# Altium PCB Driver.PcbDoc
Units mil, origin at the board's own origin, x right, y up, seen from the top; angles counter-clockwise.
Board outline 2360 x 2470 mil, 2 copper layers (Top Layer, Bottom Layer); 33 components, 20 nets, 116 pads, 97 vias.
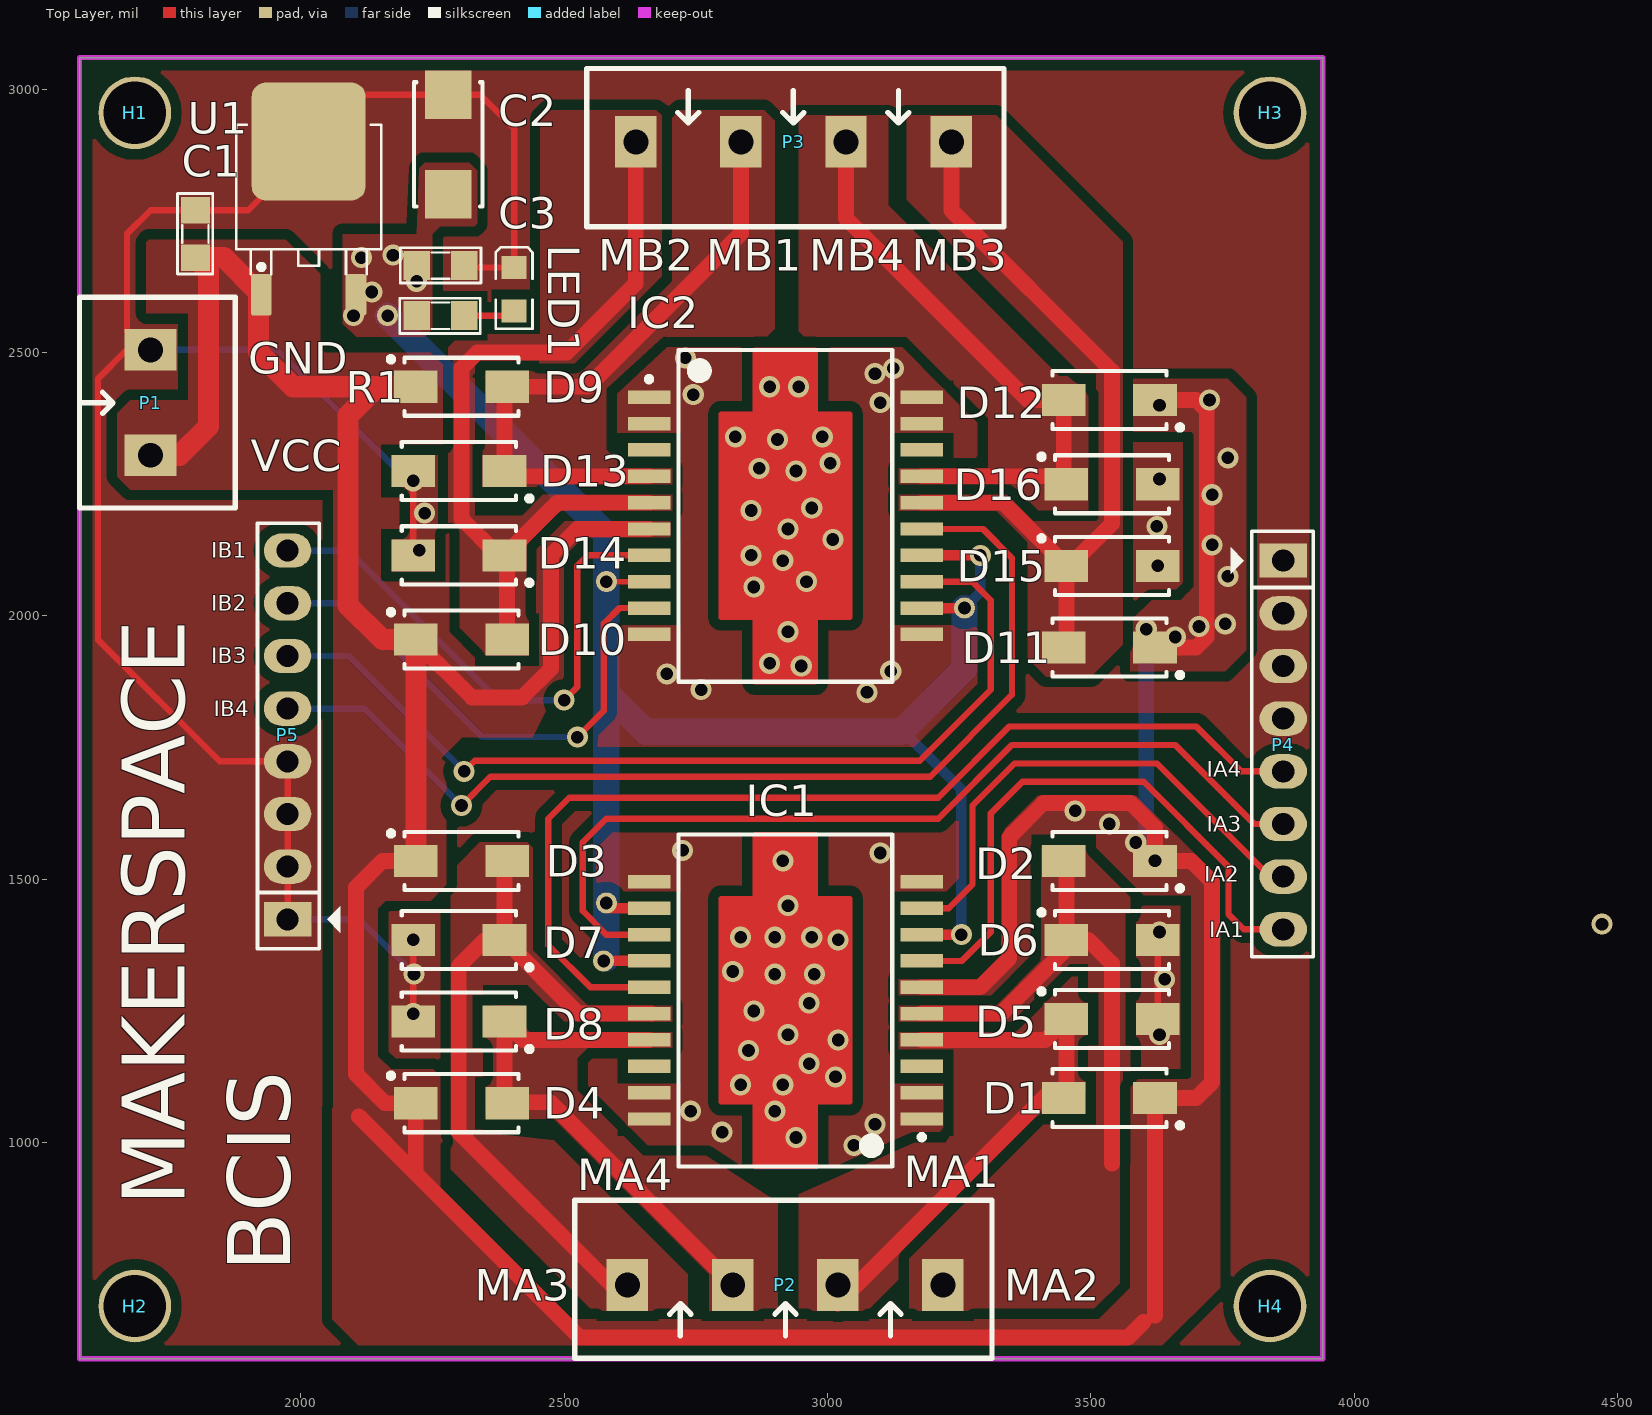
[diagram p0: Top Layer view]
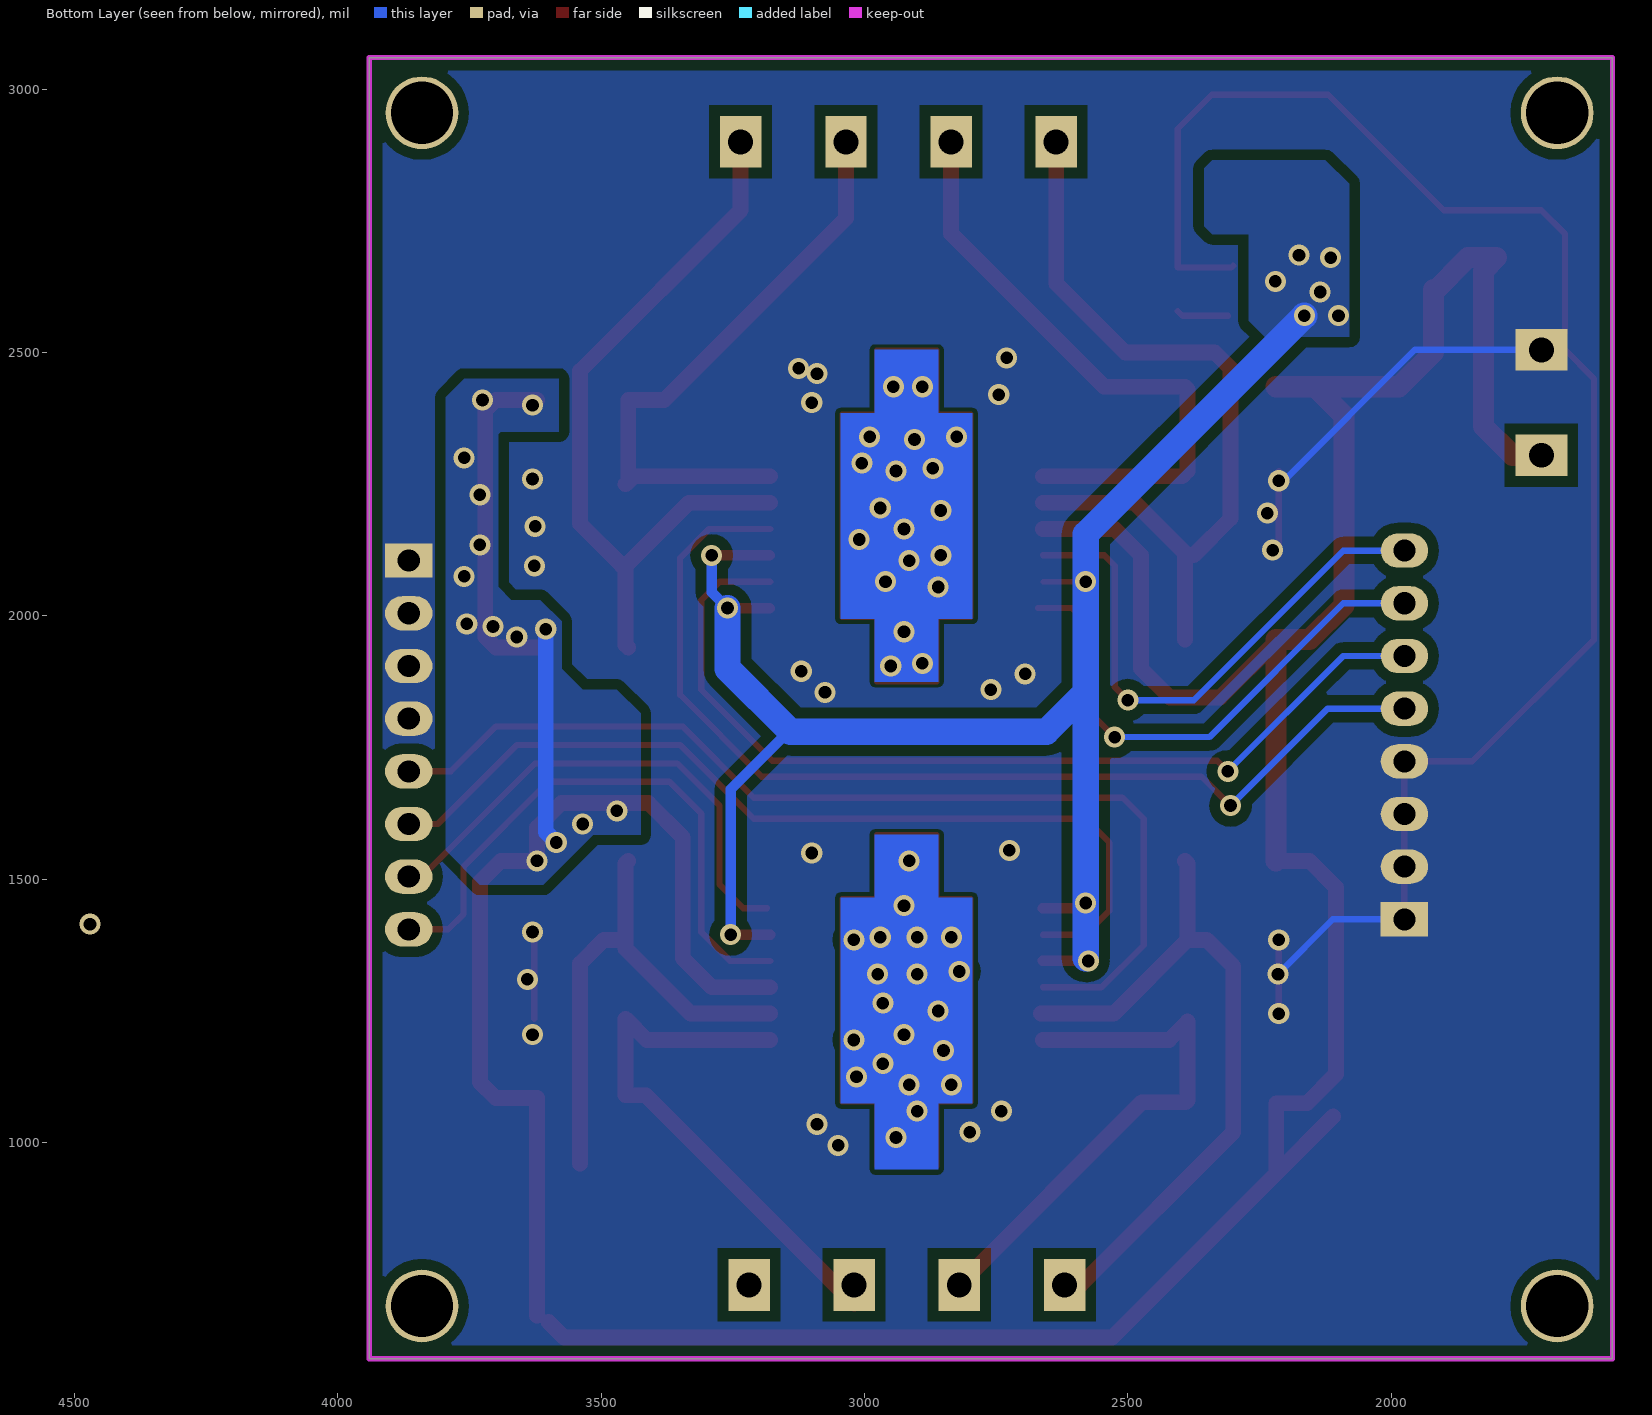
[diagram p1: Bottom Layer view, seen from below]
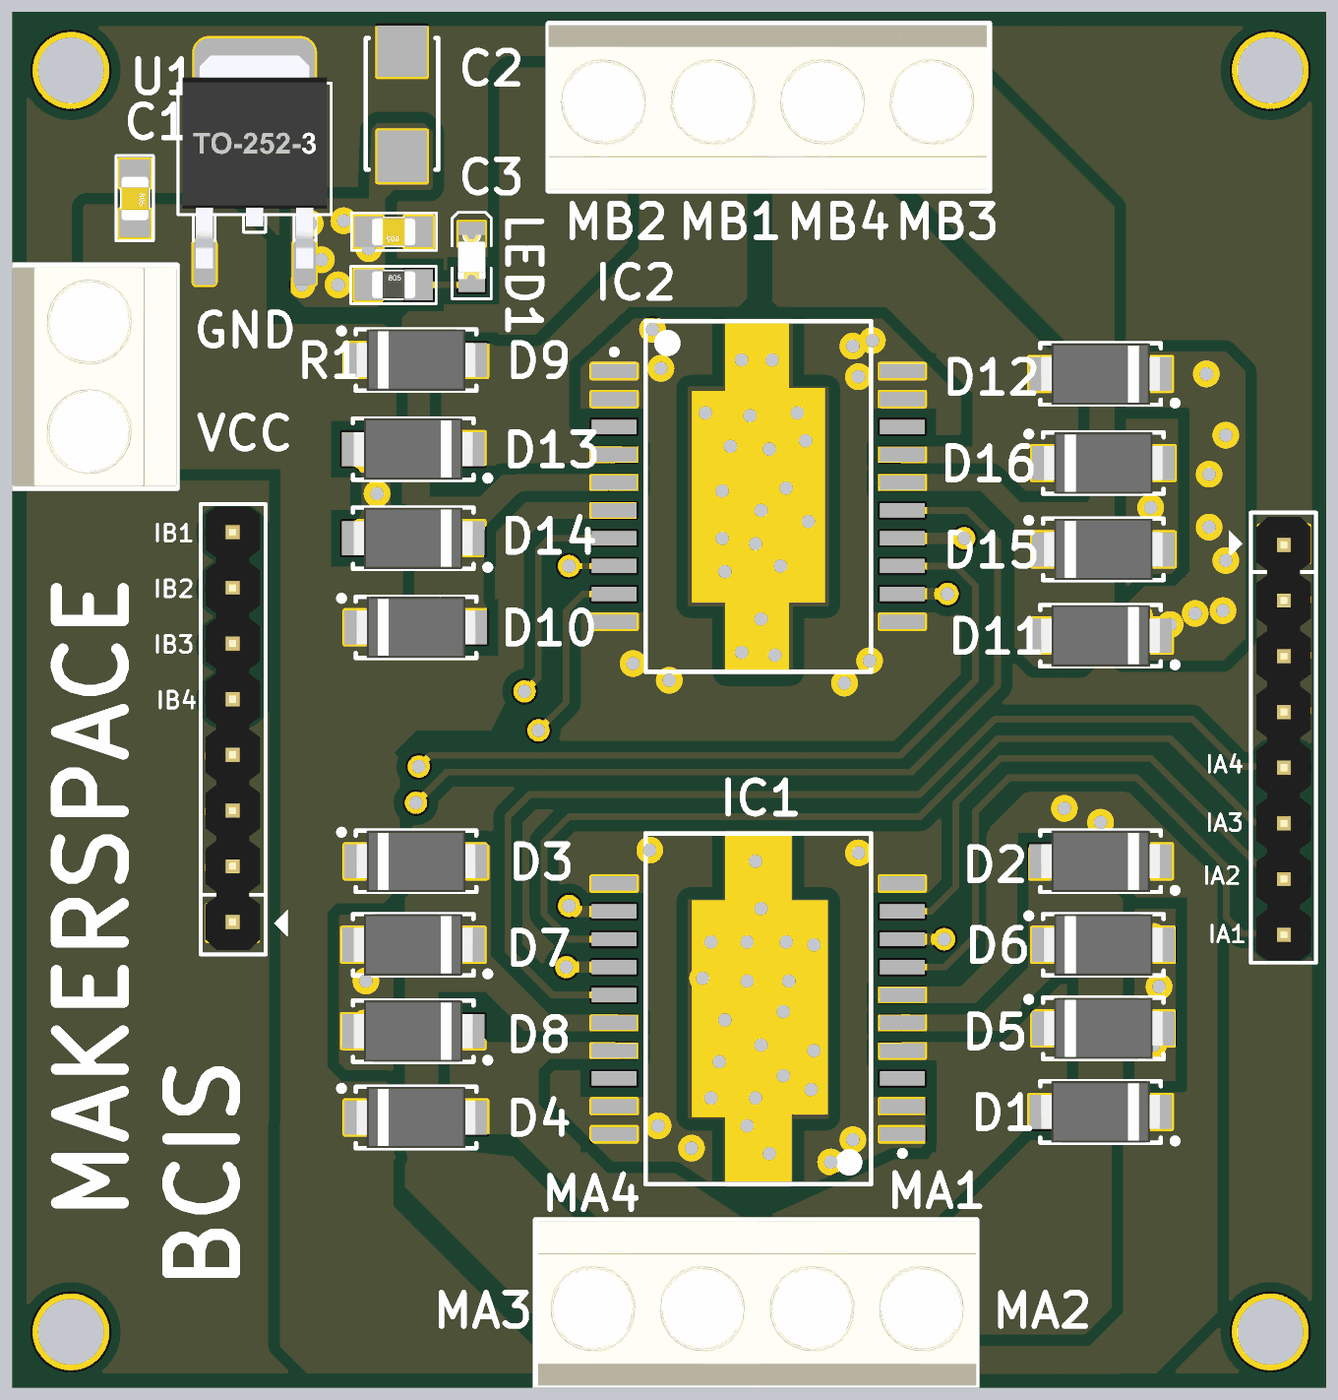
[diagram p2: 3D render of the assembled board from above, using the file's embedded part models]

## Layer stack, top to bottom
Top Solder: solder mask 0.4, Solder Resist, Dk 3.5
Top Layer: signal copper 1.4
Dielectric 1: dielectric 12.6, FR-4, Dk 4.8
Bottom Layer: signal copper 1.4
Bottom Solder: solder mask 0.4, Solder Resist, Dk 3.5

## Board outline
1580,590 3940,590 3940,3060 1580,3060

## Design rules (kind name [scope] priority, off if disabled: settings)
Clearance [All] p1: gap=10 ignorepadtopadclearanceinfootprint=FALSE except(0: Arc-Hole Track-Hole SMDPad-Hole THPad-Hole Via-Hole Fill-Hole Poly-Hole Region-Hole Text-Hole; 20: Arc-Poly Track-Poly SMDPad-Poly THPad-Poly Via-Poly Fill-Poly Poly-Poly)
PlaneConnect [All] p1: planeconnectstyle=Direct reliefexpansion=20 reliefentries=4 reliefconductorwidth=10 reliefairgap=10
PolygonConnect [All] p1: connectstyle=Direct reliefconductorwidth=10 reliefentries=4 polygonreliefangle="90 Angle" airgapwidth=10
RoutingVias [All] p1: holewidth=24 width=40 viastyle="Through Hole" minholewidth=24 minwidth=40 maxholewidth=28 maxwidth=50
SolderMaskExpansion [All] p1: expansion=4
Width [All] p1: maxlimit=100 minlimit=10 preferedwidth=10 minimp=50.000000 maximp=50.000000 favimp=50.000000
29 further rules are at their usual default settings.

## Components (designator, comment, footprint, x,y, rotation, side; value= is the part's Value field where it differs from the comment)
C1 "Cap Non-Pol SMD" CAP-SM-0805 1800,2770 r270 top value=104
C2 "Cap Non-Pol SMD" CAP-2312 2280,2895 r270 top value=47uF
C3 "Cap Non-Pol SMD" CAP-SM-0805 2310,2665 r180 top value=104
D1 "Diode-S" SS34 3535,1085 r180 top
D2 "Diode-S" SS34 3535,1535 r180 top
D3 "Diode-S" SS34 2305,1535 r0 top
D4 "Diode-S" SS34 2305,1075 r0 top
D5 "Diode-S" SS34 3539.92,1235 r0 top
D6 "Diode-S" SS34 3539.92,1385 r0 top
D7 "Diode-S" SS34 2300.08,1385 r180 top
D8 "Diode-S" SS34 2300.08,1230 r180 top
D9 "Diode-S" SS34 2305,2435 r0 top
D10 "Diode-S" SS34 2305,1955 r0 top
D11 "Diode-S" SS34 3535,1940 r180 top
D12 "Diode-S" SS34 3535,2410 r180 top
D13 "Diode-S" SS34 2300.08,2275 r180 top
D14 "Diode-S" SS34 2300.08,2115 r180 top
D15 "Diode-S" SS34 3539.92,2095 r0 top
D16 "Diode-S" SS34 3539.92,2250 r0 top
H1 "Hole" "LO KHOAN 3MM" 1685,2955 r0 top
H2 "Hole" "LO KHOAN 3MM" 1685,690 r0 top
H3 "Hole" "LO KHOAN 3MM" 3840,2955 r0 top
H4 "Hole" "LO KHOAN 3MM" 3840,690 r0 top
IC1 "L298P" L298P 2920,1270 r180 top
IC2 "L298P" L298P 2920,2190 r0 top
LED1 "LED SMD" LED_0805_Blue 2405,2620 r90 top
P1 "Domino 2" "DOMINO 2- 5mm" 1715,2405 r90 top
P2 "Domino 4" "DOMINO 4 -5mm" 2620,730 r0 top
P3 "Domino 4" "DOMINO 4 -5mm" 3235,2900 r180 top
P4 "Header 8" JP8 3865,2105 r270 top
P5 "Header 8" JP8 1975,1424 r90 top
R1 "RESISTOR SMD" RES-SM-0805 2220,2570 r0 top value=1K
U1 "LM78xx" TO252-123 2015,2755 r0 top

## Footprints (in the part's own frame and the unit in brackets; to place one, negate y for a bottom-side part, rotate by r counter-clockwise, add the part's x,y. Pads: shape width x height; smd on the part's side, far side on the other; paste and mask are expansions set on the pad)
CAP-2312 [mm]
  rect 2.35x2.25 smd: 1(-2.4,0) 2(2.4,0)
  silkscreen extent -3,-1.65 3,1.65, body extent -3,-1.6 3,1.6, height 2.6
CAP-SM-0805 [mil]
  rect 50x55 smd: 1(0,0) 2(90,0)
  silkscreen extent -32,-34 121,33, body extent 6,-25 84,25, height 31
"DOMINO 2- 5mm" [mm]
  rect 2x2.5 hole 1.2: 1(-2.54,0) 2(2.54,0)
  silkscreen extent -5.08,-4.08 5.08,3.43, body extent -5,-4.07 5,3.43, height 10
"DOMINO 4 -5mm" [mm]
  rect 2x2.5 hole 1.2: 1(0,0) 2(5.08,0) 3(10.147,0) 4(15.215,0)
  silkscreen extent -2.54,-3.53 17.58,4.09, body extent -2.43,-3.46 17.57,4.04, height 10
JP8 [mil] "JP8"
  rect 65x90 hole 42: 1(0,0)
  oval 65x90 hole 42: 2(100,0) 3(200,0) 4(300,0) 5(400,0) 6(500,0) 7(600,0) 8(700,0)
  silkscreen extent -56,-100 752,57, body extent -48,-50 748,48, height 323
L298P [mm]
  rect 2.05x0.65 smd: 1(-6.575,5.715) 2(-6.575,4.445) 3(-6.575,3.175) 4(-6.575,1.905) 5(-6.575,0.635) 6(-6.575,-0.635) 7(-6.575,-1.905) 8(-6.575,-3.175) 9(-6.575,-4.445) 10(-6.575,-5.715) 11(6.575,-5.715) 12(6.575,-4.445) 13(6.575,-3.175) 14(6.575,-1.905) 15(6.575,-0.635) 16(6.575,0.635) 17(6.575,1.905) 18(6.575,3.175) 19(6.575,4.445) 20(6.575,5.715)
  Top Layer region: -1.45,-8 1.45,-8 1.45,-4.9 -1.45,-4.9
  Top Layer region: -3.1,-4.9 3.048,-4.9 3.048,4.9 -3.1,4.9
  Top Layer region: -1.45,4.9 1.499,4.9 1.499,8 -1.45,8
  Top Layer region: 1.524,-4.9 3.1,-4.9 3.1,-4.826 1.524,-4.826
  Top Layer region: 1.45,4.826 3.1,4.826 3.1,4.9 1.45,4.9
  Top Layer lines w0.254: 3.1,4.9 1.45,4.9 1.45,8 -1.45,8 -1.45,4.9 -3.1,4.9 -3.1,-4.9 -1.45,-4.9 -1.45,-8 1.45,-8 1.45,-4.9 3.1,-4.9 3.1,4.9
  silkscreen extent -6.7,-8 5.15,8, body extent -5.55,-8 5.55,8, height 3.6
LED_0805_Blue [mm] "Chip LED, 2-Leads, Body 2.0x1.3mm, IPC Medium Density"
  rect 1.1x1.2 smd: 1(-1.05,0) 2(1.05,0)
  silkscreen extent -1.91,-0.89 2.03,0.89, body extent -1,-0.63 1,0.62, height 0.68
"LO KHOAN 3MM" [mil]
  round 138 hole 118.1: 1(0,0)
RES-SM-0805 [mil]
  rect 50x55 smd: 1(0,0) 2(90,0)
  silkscreen extent -32,-34 121,33, body extent 6,-25 84,25, height 31
SS34 [mm] "DO-214-AC/SMA Molded Diode, Body 5.3x2.6mm, IPC Medium Density"
  rect 2.1x1.55 smd: 1(-2.2,0) 2(2.2,0)
  silkscreen extent -3.53,-1.4 2.75,1.45, body extent -2.75,-1.4 2.75,1.4, height 2.3
TO252-123 [mm]
  round 0.5 on Mech15: 0(0,0)
  rrect25% 1x2 smd: 1(-2.285,-3.7) 3(2.285,-3.7)
  rrect25% 5.5x5.7 smd: 2(0,3.7)
  silkscreen extent -3.5,-2.7 3.5,4.5, body extent -3.3,-3.95 3.3,5.76, height 2.31

## Part data
C1 C2 C3: "Capacitor"
H1 H2 H3 H4: "Hole 3mm"
LED1: "LED"
P1: "Domino, 2-Pin", LatestRevisionDate=17-Jul-2002, LatestRevisionNote="Re-released for DXP Platform.", Publisher="Altium Limited"
P2 P3: "Domino 4-Pin", LatestRevisionDate=17-Jul-2002, LatestRevisionNote="Re-released for DXP Platform.", Publisher="Altium Limited"
P4 P5: "Header, 8-Pin", LatestRevisionDate=17-Jul-2002, LatestRevisionNote="Re-released for DXP Platform.", Publisher="Altium Limited"
R1: "Resistor"
U1: "Positive Voltage Regulator", ComponentLink1Description="Manufacturer Link", ComponentLink1URL=http://www.st.com/, ComponentLink2Description=Datasheet, ComponentLink2URL=http://www.st.com/stonline/products/literature/ds/2146/l78m05c.pdf, DatasheetVersion=Apr-1994, LatestRevisionDate=17-Jul-2002, LatestRevisionNote="Re-released for DXP Platform.", Note="Tab is connected to pin 3 (GND).", PackageDescription="TO, Thru-Hole, Vertical, Heatsink Mounted; 3 In-Line Leads; Pitch 2.54 mm; Pin sequence 1, 3, 2", PackageReference=ISOWATT220AB, PackageVersion=Jul-1998, Published=24-Aug-2001, Publisher="Altium Limited"

## Via types
v1: diameter 40, hole 24, Top Layer to Bottom Layer, 97 vias

## Nets (pads, with @x,y where several pads share a name; then routed paths per layer and width w, separated by ;. In a path a pad name is that pad's centre, name@x,y a point inside that pad or via, vN(x,y) a via of type N, cw(c..) or ccw(c..) an arc to the next point about the centre after c; other vN are vias at no path point)
5V: C2.2 C3.2 IC1.8 IC1.12 IC1.14 IC2.8 IC2.12 IC2.14 R1.1 U1.3 | length 3340.2
  Top Layer w10: v1(2580,2065) IC2.8
  Top Layer w20: v1(2575,1345) IC1.14 ; v1(2580,1455) 2590,1445 IC1.12 ; IC1.8 v1(3254.09,1395) ; IC2.12@3180,2015 v1(3260,2015) ; IC2.14@3180,2115 v1(3290,2115)
  Bottom Layer w20: v1(2575,1345) v1@2580,1350 ; 3140,1780 3145,1780 3254.09,1670.91 v1(3254.09,1395) ; v1(3260,2015) 3290,2045 v1(3290,2115)
  Bottom Layer w50: v1(2165,2570) 2580,2155 v1(2580,2065) 2580,1855 ; v1@2580,1350 v1(2580,1455) 2580,1855 ; v1(3260,2015) 3260,1900 3140,1780 2655,1780 2580,1855
  other v1: 2100,2570 2135,2615 2220,2635 2115,2680 2175,2685
GND: C1.1 C2.1 C3.1 D5.2 D6.2 D7.2 D8.2 D13.2 D14.2 D15.2 D16.2 IC1.1 IC1.2 IC1.10 IC1.11 IC1.19 IC1.20 IC2.1 IC2.2 IC2.10 IC2.11 IC2.19 IC2.20 LED1.2 P1.2 P4.1 P4.2 P4.3 P4.4 P5.1 P5.2 P5.3 P5.4 U1.2 | length 4198.9
  Top Layer w12: P1.2 P1.2@1705,2505 ; P5.1 P5.2 P5.3 P5.4 1846,1724 1615,1955 1615,2450 1670,2505 P1.2@1705,2505 ; D8.2 v1(2213.46,1245) v1(2213.46,1385) ; D14.2 2213.46,2195 v1(2213.46,2256.54) D13.2 ; C3.1@2300,2665 2303.66,2661.34 LED1.2 2405,2925 2340.51,2989.49 C2.1 2119.49,2989.49 1900,2770 C1.1 1715,2770 1670,2725 1670,2540 P1.2@1705,2505 ; D5.2 D6.2
  Bottom Layer w12: P1.2 1955,2505 2203.46,2256.54 v1(2213.46,2256.54) ; P5.1 2111,1424 v1(2215,1320)
  other v1: 3050,995 2800,1020 3090,1035 2740,1060 3630,1205 3640,1310 3630,1400 3100,1550 2725,1555 3075,1855 2760,1860 2695,1890 3120,1895 3626.54,2095 2225,2125 3625,2170 2235,2195 3630,2260 3100,2405 2745,2420 3090,2460 3125,2470 2730,2490
INA-1: IC1.7 P4.8 | length 1127.5
  Top Layer w12: IC1.7 3255,1345 3310,1400 3310,1625 3370,1685 3600,1685 3761,1524 3761,1434 3790,1405 P4.8
INA-2: IC1.9 P4.7 | length 970.8
  Top Layer w12: IC1.9@3185,1445 3230,1445 3275,1490 3275,1640 3355,1720 3625,1720 3840,1505 P4.7
INA-3: IC1.13 P4.6 | length 1743.5
  Top Layer w12: IC1.13 2580,1395 2535,1440 2535,1570 2580,1615 3210,1615 3350,1755 3660,1755 3810,1605 P4.6
INA-4: IC1.15 P4.5 | length 1967
  Top Layer w12: IC1.15 2550,1295 2470,1375 2470,1615 2510,1655 3210,1655 3345,1790 3700,1790 3785,1705 P4.5
INB-1: IC2.7 P5.8 | length 1065.1
  Top Layer w12: v1(2500,1840) 2525,1865 2525,2095 2545,2115 IC2.7
  Bottom Layer w12: P5.8@1984,2115 P5.8 2091,2124 2375,1840 v1(2500,1840)
INB-2: IC2.9 P5.7 | length 1011.1
  Top Layer w12: v1(2525,1770) 2575,1820 2575,1985 2605,2015 IC2.9 IC2.9@2670,2015
  Bottom Layer w12: P5.7@1984,2015 P5.7 2091,2024 2345,1770 v1(2525,1770)
INB-3: IC2.13 P5.6 | length 1805.6
  Top Layer w12: v1(2310,1705) 2330,1725 3175,1725 3310,1860 3310,2030 3275,2065 IC2.13
  Bottom Layer w12: P5.6 2091,1924 v1(2310,1705)
INB-4: IC2.15 P5.5 | length 1992.1
  Top Layer w12: v1(2305,1640) 2360,1695 3195,1695 3350,1850 3350,2110 3295,2165 IC2.15
  Bottom Layer w12: P5.5 2121,1824 v1(2305,1640)
NetLED1_1: LED1.1 R1.2 | length 98.6
  Top Layer w12: R1.2 2396.34,2570 LED1.1
OUTA-1: D1.2 D5.1 IC1.4 P2.3 | length 1033.7
  Top Layer w30: P2.3@3019.5,694.5 3414.92,1089.92 3453.31,1089.92 D5.1 3413.31,1195 IC1.4
OUTA-2: D2.2 D6.1 IC1.5 P2.4 | length 979.6
  Top Layer w30: IC1.5 3330,1245 3453.31,1368.31 D6.1 ; D2.2 3453.31,1530.08 D6.1 ; 3540,960 3540,1340 3495,1385 D6.1
OUTA-3: D3.2 D7.1 IC1.16 P2.1 | length 1350.9
  Top Layer w30: D3.2 2386.69,1530.08 D7.1 ; P2.1 2590,730 2300,1020 2300,1335 2350,1385 D7.1 ; IC1.16@2665,1245 IC1.16 2526.69,1245 D7.1
OUTA-4: D4.2 D8.1 IC1.17 P2.2 | length 1017.3
  Top Layer w30: IC1.17 2421.69,1195 D8.1 2386.69,1079.92 2390,1076.61 2473.39,1076.61 P2.2
OUTB-1: D9.2 D13.1 IC2.4 P3.3 | length 1179.3
  Top Layer w30: IC2.4 2396.69,2265 D13.1 2386.69,2430.08 D9.2 2545,2435 2835.5,2725.5 P3.3
OUTB-2: D10.2 D14.1 IC2.5 P3.4 | length 1536.2
  Top Layer w30: D14.1 2375,2115 2305,2185 2305,2470 2335,2500 2505,2500 2636,2631 P3.4 ; D10.2 2391.69,1955.08 2391.69,2120 2486.69,2215 IC2.5
OUTB-3: D11.2 D15.1 IC2.16 P3.1 | length 1452.4
  Top Layer w30: IC2.16 3333.31,2215 D15.1 ; P3.1 3235,2770 3540,2465 3540,2175 3460,2095 D15.1 ; D11.2 3453.31,1944.92 D15.1
OUTB-4: D12.2 D16.1 IC2.17 P3.2 | length 1137
  Top Layer w30: P3.2 3035,2755 3380,2410 D12.2 D16.1@3448.39,2254.92 ; IC2.17 3438.31,2265 D16.1@3448.39,2254.92 ; D16.1 D16.1@3448.39,2254.92
VCC: C1.2 D1.1 D2.1 D3.1 D4.1 D9.1 D10.1 D11.1 D12.1 IC1.6 IC2.6 P1.1 U1.1 | length 8154.8
  Top Layer w30: 2110,1050 2218.39,941.61 ; D10.1@2215,1955 2217.5,1952.5 2325,1845 2420,1845 2475,1900 2475,2115 2525,2165 IC2.6 ; D3.1 2155,1535 2105,1485 2105,1130 2160,1075 D4.1 2218.39,941.61 ; IC1.6 3290,1295 3345,1350 3345,1580 3410,1645 3575,1645 3621.61,1598.39 v1(3621.61,1535) 3690,1535 3730,1495 3730,1115 3700,1085 D1.1 3621.61,671.61 ; 3600,660 3570,630 2530,630 2218.39,941.61 ; D11.1 3700,1940 3720,1960 3720,2135 3720,2390 3700,2410 D12.1
  Top Layer w40: P1.1 1770,2305 1825,2360 1825,2655 C1.2 1854.37,2680 U1.1@1920,2614.37 ; U1.1@1920,2620 U1.1@1920,2614.37 ; D10.1@2217.5,1952.5 2215,1950 2218.39,1946.61 D3.1 ; D10.1 2215,1955 2155,1955 2090,2020 2090,2380 2145,2435 ; D9.1 2145,2435 ; U1.1@1920,2614.37 1920,2500 1985,2435 2145,2435
  Bottom Layer w30: v1(3585,1570) 3605,1590 v1(3605,1975)
  other v1: 3535,1605 3470,1630 3660,1960 3705,1980 3755,1985 3760,2075 3730,2135 3730,2230 3760,2300 3630,2400 3725,2410
pads on no net: H1.1 H2.1 H3.1 H4.1 IC1.3 IC1.18 IC2.3 IC2.18 U1.0
copper on no net:
  other v1: 2940,1010 2900,1060 2835,1110 2915,1110 3015,1125 2965,1150 2850,1175 3020,1195 2925,1205 2860,1250 2965,1265 2900,1320 2975,1320 2820,1325 3020,1385 2835,1390 2900,1390 2970,1390 4470,1415 2925,1450 2915,1535 2950,1905 2890,1910 2925,1970 2860,2055 2960,2065 2915,2105 2855,2115 3010,2145 2925,2165 2855,2200 2970,2205 2940,2275 2870,2280 3005,2290 2905,2335 2825,2340 2990,2340 2890,2435 2945,2435

## Polygon pours and split planes (outlines as drawn)
GND on Top Layer "GND_L01_P089" (solid, pour order 89): 1580,3060 3940,3060 3940,590 1580,590
OUTA-4 on Top Layer "OUTA-4_L01_P088" (solid, pour order 88): 2705,1210 2705,1180 2545,1180 2525,1160 2525,1100 2650,975 2770,975 2905,886.96 2905,675 2775,675 2775,750 2480,1045 2365,1045 2350,1060 2350,1245 2365,1260 2415,1260 2425,1250 2425,1220 2435,1210
OUTA-3 on Top Layer "OUTA-3_L01_P086" (solid, pour order 86): 2705,1260 2705,1230 2500,1230 2430,1300 2345,1300 2345,1285 2345,1020 2480,1005 2735,750 2735,675 2560,675 2285,950 2285,1515 2340,1570 2430,1570 2440,1560 2440,1365 2545,1260
OUTB-1 on Top Layer "OUTB-1_L01_P064" (solid, pour order 64): 2900,2730 2900,2545 2885,2530 2680,2530 2630,2480
OUTA-1 on Top Layer "OUTA-1_L01_P058" (solid, pour order 58): 3135,1210 3345,1210 3450,1315 3490,1315 3500,1305 3500,1105 3070,675 2945,675 2945,901.7 3165,1000 3224.38,1000 3240,1025 3240,1175 3135,1175
OUTA-2 on Top Layer "OUTA-2_L01_P056" (solid, pour order 56): 3135,1260 3320,1260 3405,1345 3405,1570 3495,1570 3575,1490 3575,740 3500,665 3155,665 3155,790 3495,1130 3495,1340 3460,1340 3350,1230 3135,1230
OUTB-1 on Top Layer "OUTB-1_L01_P054" (solid, pour order 54): 2705,2280 2705,2250 2700,2245 2345,2245 2345,2460 2350,2465 2535,2465 2705,2635 2705,2945 2720,2960 2880,2960 2900,2940 2900,2723.76 2580,2430.98 2580,2315 2615,2280
VCC on Top Layer "VCC_L01_P052" (solid, pour order 52): 3135,1310 3285,1310 3330,1355 3330,1590 3405,1665 3580,1665 3745,1500 3745,725 3610,590 2135,590 2060,665 2060,1065 2264.7,1065 2264.7,915.3 2515,665 3515,665 3575,725 3575,1105 3590,1120 3685,1120 3690,1125 3690,1470 3600,1470 3555,1515 3485,1585 3405,1585 3385,1565 3385,1355 3310,1280 3135,1280
OUTB-2 on Top Layer "OUTB-2_L01_P050" (solid, pour order 50): 2705,2230 2705,2200 2510,2200 2440,2130 2440,1920 2425,1905 2345,1905 2280,1970 2280,2510 2305,2535 2455,2535 2455,2945 2470,2960 2675,2960 2685,2950 2685,2645 2520,2480 2350,2480 2325,2455 2330,2450 2330,2190 2420,2190 2460,2230
VCC on Top Layer "VCC_L01_P048" (solid, pour order 48): 2701.54,2179.51 2701.54,2149.51 2536.54,2149.51 2501.54,2114.51 2501.54,1889.51 2440,1769.51 2306.54,1769.51 2266.54,1729.51 2276.54,1719.51 2276.54,1489.51 2246.54,1459.51 2161.54,1459.51 2146.54,1444.51 2146.54,1164.51 2171.54,1139.51 2251.54,1139.51 2271.54,1119.51 2271.54,1004.51 2256.54,989.51 2136.54,989.51 2061.54,1064.51 2061.54,2239.51 2061.54,2231.05 2061.54,2239.51 1676.54,2239.51 1651.54,2264.51 1651.54,2384.51 1676.54,2409.51 1786.54,2409.51 1786.54,2574.51 1706.54,2574.51 1706.54,2709.51 1711.54,2714.51 1971.54,2714.51 2036.54,2649.51 2036.54,2509.51 2046.54,2499.51 2246.54,2499.51 2281.54,2464.51 2281.54,1969.51 2341.54,1909.51 2431.54,1909.51 2446.54,1924.51 2446.54,2134.51 2491.54,2179.51
VCC on Top Layer "VCC_L01_P070" (solid, pour order 70): 3580,2450 3760,2450 3795,2415 3795,1935 3755,1895 3575,1895 3575,1990 3615,2030 3670,2030 3695,2055 3695,2345 3690,2350 3580,2350
OUTB-4 on Top Layer "OUTB-4_L01_P066" (solid, pour order 66): 2945,2755 2945,2540 2955,2530 3154.88,2530
OUTB-4 on Top Layer "OUTB-4_L01_P046" (solid, pour order 46): 3135,2280 3305,2280 3305,2375 2945,2735 2945,2950 3115,2950 3115,2780 3440,2455 3490,2455 3500,2445 3500,2200 3490,2190 3410,2190 3360,2240 3135,2240
OUTB-3 on Top Layer "OUTB-3_L01_P044" (solid, pour order 44): 3135,2230 3340,2230 3390,2180 3510,2180 3515,2185 3515,2425 3150,2790 3150,2950 3320,2950 3560,2710 3560,1945 3500,1885 3415,1885 3380,1920 3380,2140 3320,2200 3135,2200
5V on Top Layer "Bottom Layer-No Net" (solid, pour order 22): 2080,2555 2105,2530 2235,2530 2250,2545 2250,2725 2265,2740 2330,2740 2335,2745 2335,2845 2320,2860 2235,2860 2225,2850 2220,2725 2080,2725
GND on Bottom Layer "GND_L02_P093" (solid, pour order 93): 1580,3060 3940,3060 3940,590 1580,590
VCC on Bottom Layer "VCC_L02_P076" (solid, pour order 76): 3425,1585 3515,1585 3610,1490 3730,1490 3795,1555 3795,1935 3610,1935 3535,1860 3470,1860 3425,1815
VCC on Bottom Layer "VCC_L02_P074" (solid, pour order 74): 3580,2450 3760,2450 3795,2415 3795,1935 3755,1895 3575,1895 3575,1990 3615,2030 3670,2030 3695,2055 3695,2345 3690,2350 3580,2350
5V on Bottom Layer "5V_L02_P068" (solid, pour order 68): 2080,2820 2125,2865 2340,2865 2355,2850 2355,2740 2340,2725 2270,2725 2270,2560 2240,2530 2080,2530
no net on Top Solder "Bottom Layer-No Net" (solid): 2860,1585 2980,1585 2980,1465 3045,1465 3045,1080 2980,1080 2980,960 2860,960 2860,1075 2800,1075 2800,1465 2860,1465
no net on Bottom Solder "Bottom Layer-No Net" (solid): 2860,2505 2980,2505 2980,2385 3040,2385 3045,2380 3045,2000 3040,1995 2980,1995 2980,1875 2865,1875 2860,1880 2860,1995 2795,1995 2795,2385 2860,2385
no net on Bottom Solder "Bottom Layer-No Net" (solid): 2975,1585 2980,1580 2980,1465 3045,1465 3045,1075 2980,1075 2980,955 2860,955 2860,1075 2800,1075 2795,1080 2795,1460 2800,1465 2860,1465 2860,1585

## Keep-outs
Keep-Out Layer:
  the board outline again, w10

## Other copper
Bottom Layer:
  region: 2860,1585 2980,1585 2980,1465 3045,1465 3045,1075 2980,1075 2980,949.8 2860,949.8 2860,1075 2795,1075 2795,1465 2860,1465
  region: 2860,2505 2980,2505 2980,2385 3045,2385 3045,1995 2980,1995 2980,1875 2860,1875 2860,1995 2795,1995 2795,2385 2860,2385

## Silkscreen, mask and mechanical layers (free items; w line width, h text height)
Top Overlay:
  text "MB2" at 2565,2655 h60
  text "MB1" at 2770,2655 h60
  text "MB4" at 2965,2655 h60
  text "MB3" at 3160,2655 h60
  text "GND" at 1900,2460 h60
  text "VCC" at 1905,2275 h60
  text "IB1" at 1830,2110 h30
  text "IB2" at 1830,2010 h30
  text "IB3" at 1830,1910 h30
  text "IB4" at 1835,1810 h30
  text "IA4" at 3720,1695 h30
  text "IA3" at 3720,1590 h30
  text "IA2" at 3715,1495 h30
  text "IA1" at 3725,1390 h30
  text "MA1" at 3145,915 h60
  text "MA4" at 2525,910 h60
  text "MAKERSPACE" at 1780,880 h120 r90
  text "BCIS" at 1980,755 h120 r90
  text "MA3" at 2330,700 h60
  text "MA2" at 3335,700 h60
Top Solder:
  region: 2860,2505 2975,2505 2975,2385 3040,2385 3040,2000 2975,2000 2975,1875 2860,1875 2860,2000 2800,2000 2800,2380 2860,2380